# Altium PCB Quadcopter_Main_PCB.PcbDoc (part 2 of 2)
Units mm, origin at the board's own origin, x right, y up, seen from the top; angles counter-clockwise.
Board outline 73 x 59 mm, 4 copper layers (Top Layer, Int1 (GND), Int2 (PWR), Bottom Layer), stack 1.586 mm thick; 101 components, 81 nets, 440 pads, 232 vias.
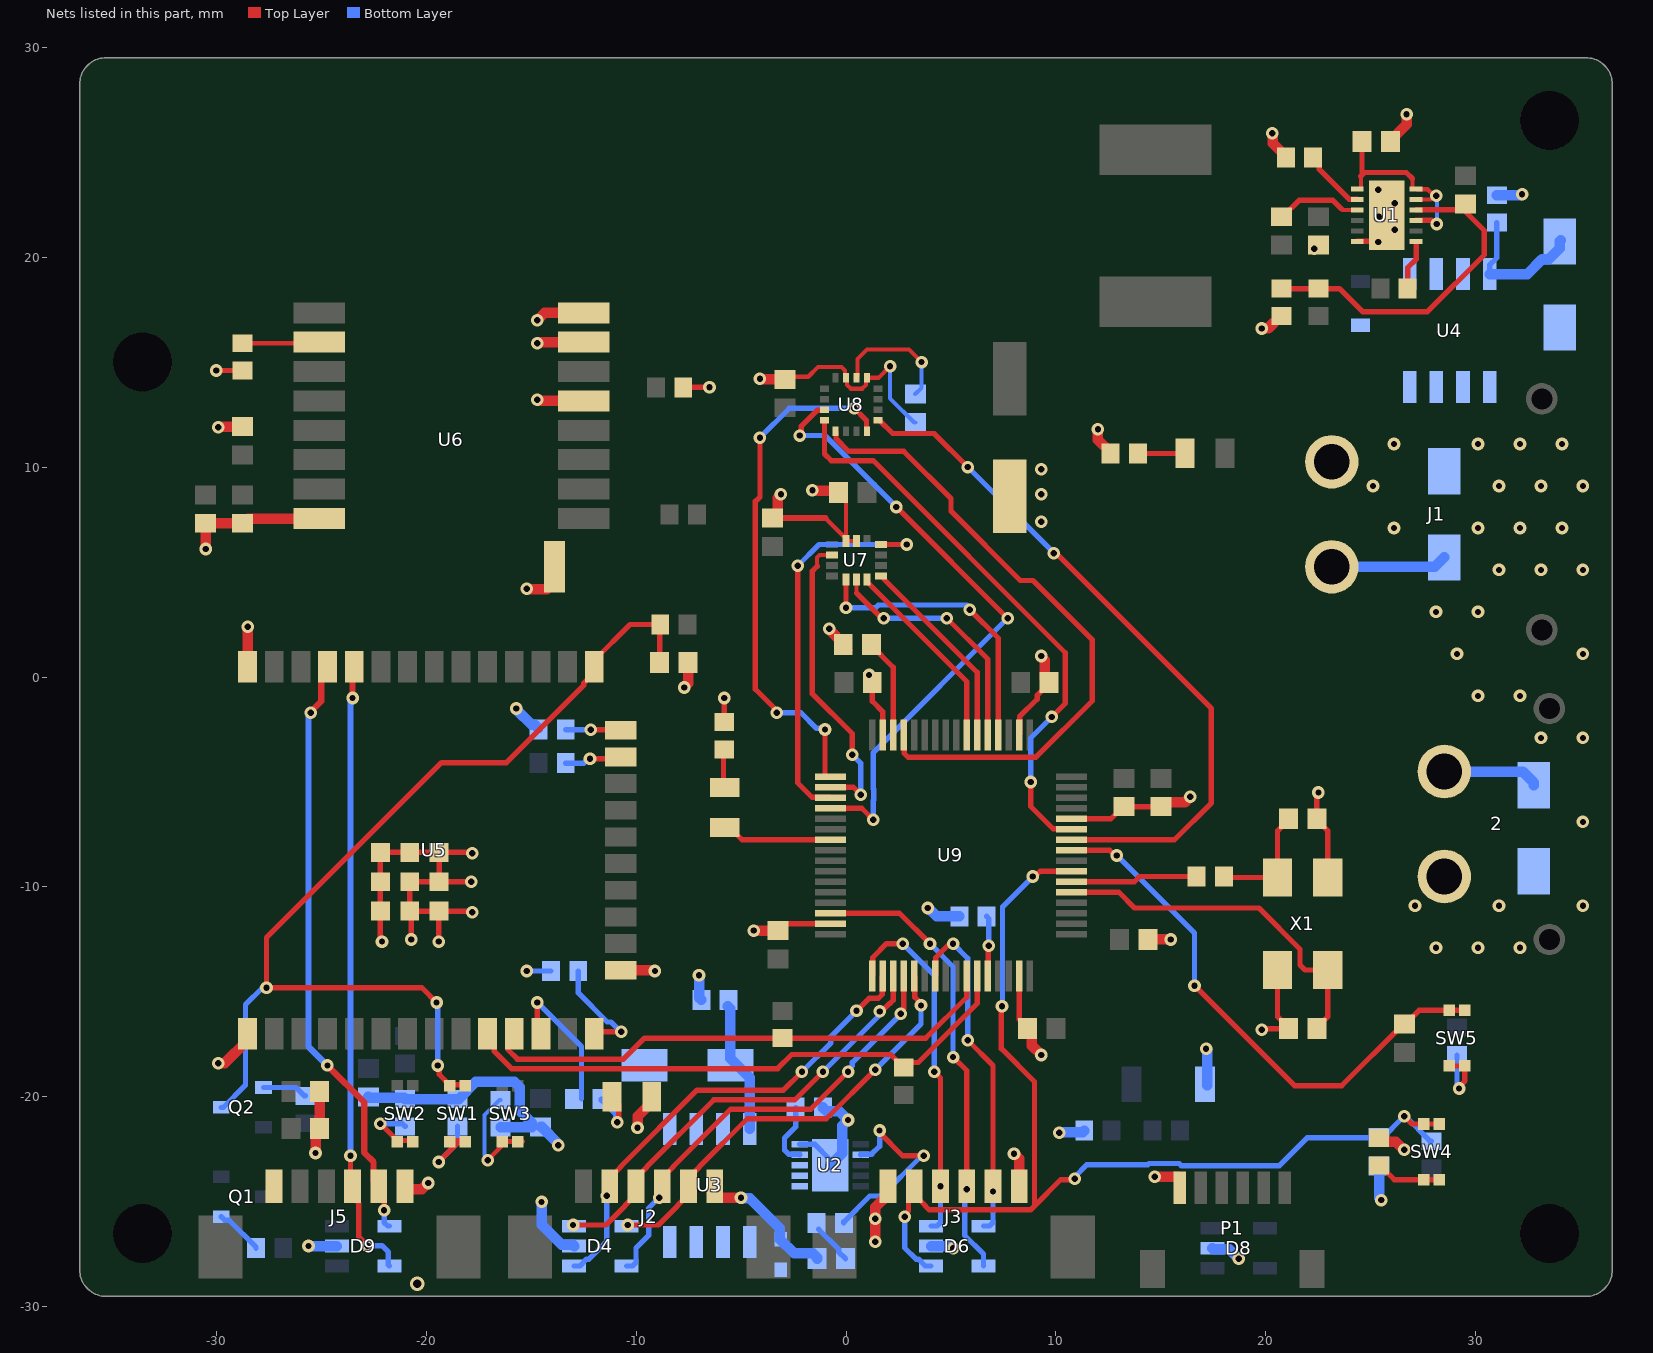
[diagram p4: the nets of this part, all layers, seen from the top]

## Via types
v1: diameter 0.6, hole 0.3, Top Layer to Bottom Layer, 231 vias
v2: diameter 0.7, hole 0.4, Top Layer to Bottom Layer, 1 vias

## Nets (pads, with @x,y where several pads share a name; then routed paths per layer and width w, separated by ;. In a path a pad name is that pad's centre, name@x,y a point inside that pad or via, vN(x,y) a via of type N, cw(c..) or ccw(c..) an arc to the next point about the centre after c; other vN are vias at no path point) (continued)
ESP_RXD0: D9.5 J5.4 U5.34 | length 29.8
  Top Layer w0.254: v1(-23.6,-22.8) -23.6,-24.15 -23.227,-24.523 -23.227,-25.045 -23.2,-25.072 -23.2,-26.673 v1(-22.789,-27.084)
  Top Layer w0.3: v1(-23.5,-1) -23.5,0.42 U5.34@-23.42,0.5
  Bottom Layer w0.254: v1(-22.789,-27.084) -22.102,-27.084 -21.8,-27.386 -21.8,-28 D9.5@-21.75,-28.05
  Bottom Layer w0.3: v1(-23.6,-22.8) -23.6,-1.1 v1(-23.5,-1)
ESP_SCL: R11.2 U5.11 U9.58 | length 25.1
  Top Layer w0.254: U5.11@-15.8,-17 -16.1,-17.3 -16.1,-17.751 -15.651,-18.2 -10.6,-18.2 -9.6,-17.2 R11.2@-3.033,-17.2 3.8,-17.2 5.75,-15.25 U9.58@5.75,-14.238
ESP_SDA: R10.2 U5.10 U9.59 | length 27.2
  Top Layer w0.254: U5.10@-17.07,-17 -17.218,-17.148 -16.747,-17.619 -16.747,-17.833 -15.926,-18.654 -3.254,-18.654 -2.582,-17.982 2.132,-17.982 2.402,-18.252 2.402,-18.302 2.7,-18.6 R10.2@2.75,-18.6 ; R10.2@2.99,-18.36 3.44,-18.36 6.25,-15.55 U9.59@6.25,-14.238
ESP_Status_LED: R26.1 U5.12 | length 7
  Top Layer w0.254: v1(-14.7,-15.5) -14.7,-16.83 U5.12@-14.53,-17
  Bottom Layer w0.254: v1(-14.7,-15.5) -12.6,-17.6 R26.1@-12.6,-20.1
ESP_TXD0: D9.4 J5.5 U5.35 | length 28.7
  Top Layer w0.254: J5.5@-22.25,-24.25 -22,-24.5 v1(-22,-25.4)
  Top Layer w0.3: v1(-25.5,-1.7) -25.5,-1.659 -24.99,-1.149 -24.99,0.2 U5.35@-24.69,0.5 ; v1(-24.7,-18.5) -22.95,-20.25 -22.95,-22.65 -22.5,-23.1 -22.5,-24 J5.5@-22.25,-24.25
  Bottom Layer w0.254: v1(-22,-25.4) -22,-25.977 -21.827,-26.15 D9.4@-21.75,-26.15
  Bottom Layer w0.3: v1(-25.5,-1.7) -25.6,-1.8 -25.6,-17.6 v1(-24.7,-18.5)
GND: 2.1 C3.2 C4.1 C5.1 C6.1 C7.2 C8.2 C9.2 C10.2 C11.2 C12.2 C13.2 C14.1 C15.1 C16.1 C17.1 C18.1 C19.1 C20.1 C21.1 C22.1 C23.1 C24.1 C25.1 C26.1 C27.1 C28.1 C29.1 D4.2 D5.1 D6.2 D7.2 D8.2 D9.2 D10.2 D11.1 D12.1 J1.2 J2.6 J3.6 J5.6 P1.1 R1.2 R4.2 R5.2 R7.2 R8.2 R9.1 R13.2 R15.1 R16.2 R17.1 R19.2 R24.1 R25.1 R27.1 R28.2 R31.2 R32.2 U1.6 U1.13 U2.5 U2.11 U5.1 U5.15 U5.38 U5.39 U5.40 U5.41 U5.42 U5.43 U5.44 U5.45 U5.46 U5.47 U6.8 U6.16 U6.21 U6.23 U6.24 U7.6 U7.7 U8.9 U8.11 U9.12 U9.18 U9.31 U9.47 U9.63 X1.2 X1.4 | length 172.3
  Top Layer w0.2: C17.1@-2.67,13.995 -2.67,14.13 -2.5,14.3 -1.8,14.3 -1.335,14.765 -0.208,14.765 -0.046,14.603 -0.046,14.296 U8.11@0,14.25 0.05,14.2 0.05,13.915 0.23,13.735 0.77,13.735 0.95,13.915 0.95,14.2 U8.9@1,14.25 1.55,14.25 v1(2.1,14.8) ; -0.988,7.575 U7.7@0,6.588 ; C16.1@-0.175,8.975 0,8.8 U7.7@0,6.588 ; U7.6@0.5,6.475 U7.7@0,6.475 U7.7@0,6.588
  Top Layer w0.254: v1(-30,14.6) R15.1@-28.75,14.6 ; v1(-29.9,11.9) v1@-29.875,11.925 ; v1(-22.1,-12.6) -22.1,-12.506 -22.18,-12.426 U5.46@-22.18,-9.75 U5.45@-22.18,-8.35 U5.44@-20.78,-8.35 U5.43@-19.38,-8.35 ; v1(-20.7,-12.5) -20.7,-11.23 U5.40@-20.78,-11.15 ; v1(-19.4,-12.6) -19.4,-11.17 U5.41@-19.38,-11.15 ; v1(-17.85,-9.75) U5.42@-19.38,-9.75 ; v1(-17.8,-11.2) -17.85,-11.15 U5.41@-19.38,-11.15 ; v1(-17.8,-8.4) -17.85,-8.35 U5.43@-19.38,-8.35 ; R17.1@-7.75,13.8 v1(-6.5,13.8) ; R31.2@-5.8,-2.15 v1(-5.8,-1) ; C24.1@-3.2,-12.075 -2.875,-11.75 U9.47@-0.738,-11.75 ; C25.1@1.25,-0.25 1.25,-1.149 1.745,-1.643 1.745,-2.757 U9.31@1.75,-2.762 ; U9.63@8.25,-14.238 8.25,-16.3 8.65,-16.7 C26.1@8.65,-16.75 ; U9.18@8.25,-2.762 8.273,-2.739 8.273,-1.889 9.102,-1.06 9.102,-0.873 9.675,-0.3 C23.1@9.675,-0.25 ; U9.12@10.738,-6.75 12.625,-6.75 13.2,-6.175 C22.1@13.25,-6.175 C28.1@15,-6.175 ; v1(19.8,-16.8) 19.85,-16.75 C19.1@21.075,-16.75 21.075,-16.7 20.55,-16.175 X1.4@20.55,-13.95 ; C20.1@22.425,-6.8 22.95,-7.325 X1.2@22.95,-9.55 ; C20.1@22.425,-6.75 22.425,-5.575 v1(22.5,-5.5) ; U1.6@24.35,20.75 25.349,20.75 v1(25.349,20.716) ; U5.40@-20.78,-11.15 U5.39@-20.78,-9.75 U5.42@-19.38,-9.75 ; U5.40@-20.78,-11.15 U5.41@-19.38,-11.15 ; U5.42@-19.38,-9.75 U5.43@-19.38,-8.35
  Top Layer w0.3: C15.1@-3.5,7.575 -0.988,7.575
  Top Layer w0.4: C21.1@-0.132,1.542 C21.1@0.118,1.292 ; v1(1.1,0.1) 1.1,-0.1 C25.1@1.25,-0.25
  Top Layer w0.5: v1(-30.5,6.1) C11.2@-30.5,7.325 C10.2@-28.75,7.325 ; v1(-29.9,-18.4) -29.6,-18.4 -28.5,-17.3 U5.1@-28.5,-17 ; v1@-29.875,11.925 C9.2@-28.75,11.925 ; C10.2@-28.638,7.438 -28.588,7.438 -28.475,7.55 U6.8@-25.09,7.55 ; U5.38@-28.5,0.5 v1(-28.5,2.4) ; v1(-25.268,-22.668) -25.249,-22.649 -25.249,-21.674 C7.2@-25.075,-21.5 C8.2@-25.075,-19.75 ; J5.6@-21,-24.25 -20.85,-24.4 -20.2,-24.4 v1(-19.9,-24.1) ; v1(-15.2,4.2) -15.174,4.174 -14.926,4.174 -14.92,4.18 -14.245,4.18 -13.895,4.53 U6.16@-13.895,5.255 ; v1(-14.7,13.2) -14.65,13.15 U6.21@-12.5,13.15 ; v1(-14.7,15.9) -14.673,15.9 -14.623,15.95 U6.23@-12.5,15.95 ; v1(-14.7,17) -14.35,17.35 U6.24@-12.5,17.35 ; U5.15@-10.74,-13.965 -9.135,-13.965 v1(-9.1,-14) ; v1(-9.932,-21.472) -9.913,-21.453 -9.913,-20.913 -9.25,-20.25 D12.1@-9.25,-20 ; v1(-7.7,-0.5) -7.7,-0.473 -7.525,-0.298 C12.2@-7.525,0.7 ; J2.6@-6.25,-24.25 -6.25,-24.65 -6.1,-24.8 v1(-5,-24.8) ; v1(-4.4,-12.075) C24.1@-3.25,-12.075 ; v1(-4.1,14.2) -4.075,14.175 C17.1@-2.9,14.175 ; C15.1@-3.5,7.575 -3.45,7.575 -3.25,7.775 -3.25,8.55 v1(-3.1,8.7) ; v1(-1.6,8.9) -1.581,8.881 -0.431,8.881 C16.1@-0.35,8.8 ; v1(-0.8,2.3) -0.781,2.281 -0.781,2.241 -0.132,1.592 C21.1@-0.132,1.542 ; v1(8,-22.7) 8.25,-22.95 J3.6@8.25,-24.25 ; C26.1@8.65,-16.75 8.85,-16.95 8.85,-17.55 v1(9.3,-18) ; v1(9.3,1) 9.3,0.973 9.475,0.798 9.475,-0.05 C23.1@9.675,-0.25 ; v1(12,11.8) 12,11.3 12.6,10.7 R1.2@12.6,10.65 ; C27.1@14.375,-12.5 v1(15.473,-12.5) ; v1(14.7,-23.8) 15.85,-23.8 15.9,-23.85 P1.1@15.9,-24.325 ; C28.1@15,-6.175 15.2,-5.975 16.125,-5.975 v1(16.4,-5.7) ; v1(19.8,16.6) 20.1,16.6 20.7,17.2 R4.2@20.75,17.2 ; v1(20.3,25.9) 20.319,25.881 20.319,25.431 20.95,24.8 R5.2@20.95,24.75 ; v1(22.3,20.4) 22.475,20.575 C4.1@22.5,20.575 ; R32.2@25.388,-21.963 25.563,-22.138 26.185,-22.138 26.56,-22.513 v1(26.588,-22.513) ; C5.1@25.925,25.5 25.925,25.55 26.7,26.325 v1(26.7,26.8)
  Bottom Layer w0.2: v1(2.1,14.8) 2.1,13.275 3.25,12.125 C18.1@3.3,12.125
  Bottom Layer w0.254: v1(-15.2,-14) R16.2@-14.05,-14 ; U2.5@-2.2,-22.25 -1.496,-22.25 -0.75,-22.996 U2.11@-0.75,-23.25
  Bottom Layer w0.5: v1(-25.6,-27.1) D9.2@-24.25,-27.1 ; C13.2@-22.75,-20 -22.7,-20.05 -21.05,-20.05 R25.1@-21,-20.1 R24.1@-18.5,-20.1 -18.45,-20.1 -17.635,-19.285 -15.797,-19.285 -15.539,-19.543 -15.539,-20.657 -15.225,-20.97 C14.1@-14.965,-21.23 ; R27.1@-16.454,-21.45 -16.445,-21.44 C14.1@-14.965,-21.44 ; v1@-15.681,-1.546 -15.681,-1.569 -14.975,-2.275 -14.825,-2.275 R19.2@-14.65,-2.45 ; C14.1@-14.543,-21.43 -14.493,-21.43 -13.719,-22.205 -13.719,-22.281 v1(-13.7,-22.3) ; v1(-14.5,-25) -14.5,-26.097 -13.547,-27.05 -13,-27.05 D4.2@-12.95,-27.1 ; v1(-7,-14.2) -7,-15.266 R8.2@-6.888,-15.378 ; v1(-5,-24.8) -4.981,-24.819 -4.581,-24.819 -3.15,-26.25 -3.15,-26.775 -2.475,-27.45 -1.575,-27.45 -1.375,-27.65 C6.1@-1.375,-27.7 ; v1@-4.4,-12.1 v1(-4.4,-12.075) ; R7.2@-1.1,-20.5 -1.1,-20.505 -0.925,-20.68 -0.32,-20.68 v1(0.1,-21.1) -0.181,-21.381 -0.181,-22.681 U2.11@-0.75,-23.25 ; v1(3.9,-11) 3.927,-11 4.327,-11.4 R28.2@5.4,-11.4 ; D6.2@4.05,-27.1 5,-27.1 v1(5.1,-27.2) ; v1(10.15,-21.7) 10.169,-21.681 11.269,-21.681 R13.2@11.35,-21.6 ; v1(17.15,-17.7) 17.15,-17.727 17.2,-17.777 D10.2@17.2,-19.45 ; D8.2@17.45,-27.2 17.5,-27.25 18.25,-27.25 v1(18.7,-27.7) ; J1.2@23.138,5.25 28.05,5.25 D5.1@28.5,5.7 ; C29.1@25.388,-23.287 25.388,-24.812 v1(25.488,-24.912) ; 2.1@28.5,-4.5 32.225,-4.5 32.75,-5.025 D7.2@32.75,-5.15 ; R9.1@31,22.95 32.123,22.95 32.173,23 v1(32.2,23)
  other v1: -15.7,-1.5 9.3,7.4 9.3,8.7 9.3,9.9 26.136,21.3 25.374,21.935 26.136,22.57 25.349,23.205
IMU_CS: U7.12 U9.20 | length 14
  Top Layer w0.254: v1(0,3.3) 0,3.4 U7.12@0,4.65 ; v1(5.9,3.2) 7.25,1.85 U9.20@7.25,-2.762
  Bottom Layer w0.254: v1(0,3.3) 1.413,3.3 1.54,3.427 5.751,3.427 5.9,3.278 v1(5.9,3.2)
IMU_EXTI1: U7.9 U9.34 | length 14.7
  Top Layer w0.2: -1.377,5.277 -1.377,5.695 -1.26,5.813 U7.9@-0.663,5.813
  Top Layer w0.254: -1.377,5.277 -1.6,5.054 -1.6,-0.8 0.3,-2.7 v1(0.3,-3.7) ; U9.34@-0.738,-5.25 0.35,-5.25 v1(0.7,-5.6)
  Bottom Layer w0.254: v1(0.3,-3.7) 0.7,-4.1 v1(0.7,-5.6)
IMU_EXTI2: U7.4 U9.35 | length 19.1
  Top Layer w0.254: v1(-2.3,5.3) -2.3,-5.038 -1.611,-5.727 -0.761,-5.727 U9.35@-0.738,-5.75 ; U7.4@1.662,6.313 v1(2.9,6.313)
  Bottom Layer w0.254: v1(-2.3,5.3) -1.287,6.313 v1(2.9,6.313)
IMU_MISO: U7.1 U9.22 | length 9.5
  Top Layer w0.254: U7.1@1.662,4.812 1.775,4.812 1.823,4.764 1.823,4.652 6.25,0.225 U9.22@6.25,-2.762
IMU_MOSI: U7.14 U9.23 | length 9.4
  Top Layer w0.254: U7.14@1,4.65 1,4.538 5.75,-0.213 U9.23@5.75,-2.762
IMU_SCK: U7.13 U9.21 | length 11.8
  Top Layer w0.2: 0.5,4 U7.13@0.5,4.65
  Top Layer w0.254: 0.5,4 1.026,3.474 ; 1.027,3.474 1.528,2.973 1.533,2.973 1.706,2.8 v1(1.8,2.8) ; v1(4.8,2.8) 6.75,0.85 U9.21@6.75,-2.762
  Bottom Layer w0.254: v1(1.8,2.8) v1(4.8,2.8)
IO0: C12.1 Q2.3 R21.1 SW1.1 SW1.3 U5.25 | length 49.6
  Top Layer w0.254: v1(-19.5,-15.5) -20.2,-14.8 v1(-27.6,-14.8) -27.6,-12.408 -19.267,-4.075 -16.173,-4.075 -12.483,-0.385 -12.483,-0.293 -11.99,0.2 U5.25@-11.99,0.5 -11.99,0.8 -10.29,2.5 R21.1@-8.85,2.5 -8.875,2.475 C12.1@-8.875,0.7 ; v1(-19.446,-18.503) -19.38,-18.57 -19.38,-18.92 -18.875,-19.425 SW1.1@-18.125,-19.425
  Bottom Layer w0.254: Q2.3@-29.76,-20.5 -29.66,-20.5 -28.6,-19.44 -28.6,-15.6 -27.8,-14.8 v1(-27.6,-14.8) ; v1(-19.5,-15.5) -19.446,-15.554 v1(-19.446,-18.503)
IO2: R19.1 U5.24 | length 2.6
  Top Layer w0.254: v1(-12.156,-2.517) -10.758,-2.517 U5.24@-10.74,-2.535
  Bottom Layer w0.254: R19.1@-13.35,-2.5 -13.333,-2.517 v1(-12.156,-2.517)
IO12: R16.1 U5.14 | length 5.2
  Top Layer w0.2: U5.14@-11.99,-17 U5.14@-11.89,-16.9
  Top Layer w0.254: U5.14@-11.89,-16.9 v1(-10.7,-16.9)
  Bottom Layer w0.254: R16.1@-12.75,-14 -12.75,-15.05 -11.371,-16.429 -11.192,-16.429 -10.72,-16.9 v1(-10.7,-16.9)
IO15: R18.1 U5.23 | length 2.7
  Top Layer w0.254: v1(-12.195,-3.899) -10.834,-3.899 U5.23@-10.74,-3.805
  Bottom Layer w0.254: R18.1@-13.35,-4.1 -12.489,-4.1 -12.288,-3.899 v1(-12.195,-3.899)
ISL85_VCC: C5.2 U1.1 U1.9 U1.11 U1.12 | length 10
  Top Layer w0.2: U1.1@24.35,23.25 24.508,23.25 24.523,23.265 24.523,23.852 ; 26.977,23.735 26.977,23.265 26.992,23.25 U1.12@27.15,23.25 27.165,23.235 27.7,23.235 v1@28.009,22.926 ; U1.11@27.15,22.75 27.834,22.75 v1@28.009,22.926 ; v1(28.118,22.926) v1@28.009,22.926
  Top Layer w0.254: 24.523,23.852 24.698,24.027 26.686,24.027 26.977,23.735 ; 24.575,24.027 C5.2@24.575,25.5 ; U1.9@27.15,21.75 27.879,21.75 28.049,21.579 v1(28.143,21.579)
  Bottom Layer w0.2: v1(28.118,22.926) 28.143,22.9 v1(28.143,21.579)
MAG_CS: U8.4 U9.33 | length 25.2
  Top Layer w0.254: v1(-4.1,11.4) -4.1,8.584 -4.317,8.367 -4.317,-0.583 -3.3,-1.6 v1(-3.3,-1.7) ; v1(-1,-2.5) -1,-4.727 -0.977,-4.75 U9.33@-0.738,-4.75 ; v1(0.4,12.8) 0.977,12.223 0.977,11.723 U8.4@1,11.7
  Bottom Layer w0.254: v1(-4.1,11.4) -2.7,12.8 v1(0.4,12.8) ; v1(-3.3,-1.7) -2.143,-1.7 -1.399,-2.444 -1.056,-2.444 v1(-1,-2.5)
MAG_EXTI: U8.15 U9.36 | length 29.9
  Top Layer w0.254: v1(-2.2,11.5) -2.134,11.566 -2.134,11.94 -1.371,12.702 -1.048,12.702 U8.15@-1.025,12.725 ; U9.36@-0.738,-6.25 0.75,-6.25 v1(1.3,-6.8) ; v1(2.4,8.1) v1(7.7,2.8)
  Bottom Layer w0.254: v1(-2.2,11.5) -1,11.5 v1(2.4,8.1) ; v1(1.3,-6.8) 1.3,-5.887 1.327,-5.86 1.327,-5.34 1.3,-5.313 1.3,-3.6 v1(7.7,2.8)
MAG_MISO: U8.5 U9.10 | length 33.4
  Top Layer w0.254: U8.5@1.525,12.225 1.6,12.225 2.225,11.6 4.2,11.6 v1(5.8,10) ; v1(9.9,5.9) 10,5.9 17.4,-1.5 17.4,-6 15.65,-7.75 U9.10@10.738,-7.75
  Bottom Layer w0.254: v1(5.8,10) v1(9.9,5.9)
MAG_MOSI: U8.16 U9.11 | length 27.4
  Top Layer w0.254: U8.16@-1.025,12.225 -1.025,10.625 -0.7,10.3 1.3,10.3 10.442,1.158 10.442,-1.258 v1(9.8,-1.9) ; v1(8.8,-5) 8.8,-6.162 9.865,-7.227 10.715,-7.227 U9.11@10.738,-7.25
  Bottom Layer w0.254: v1(8.8,-5) 8.8,-2.9 v1(9.8,-1.9)
MAG_SCK: U8.1 U9.29 | length 30.8
  Top Layer w0.254: U8.1@-0.5,11.7 -0.477,11.677 -0.477,11.354 0.123,10.754 2.746,10.754 5,8.5 5,7.9 8.3,4.6 8.9,4.6 11.731,1.769 11.731,-1.131 9.035,-3.826 2.965,-3.826 2.773,-3.635 2.773,-2.785 U9.29@2.75,-2.762
Main_MOSFET_Gate: D3.1 R9.2 U4.4 | length 6.9
  Bottom Layer w0.254: U4.4@30.655,19.188 30.655,19.626 31,19.971 R9.2@31,21.65
  Bottom Layer w0.5: U4.4@30.655,19.188 32.438,19.188 33.15,19.9 33.475,19.9 34,20.425 D3.1@34,20.75 D3.1@34.05,20.8
Main_MOSFET_Source: D3.2 F1.1 U4.1 U4.2 U4.3
NetC1_2: C1.2 U1.3 | length 4.1
  Top Layer w0.2: 23.6,22.3 23.65,22.25 U1.3@24.35,22.25
  Top Layer w0.254: C1.2@20.75,21.925 20.8,21.925 21.577,22.702 23.198,22.702 23.6,22.3
NetC2_1: C2.1 R2.2 R4.1 U1.10 | length 15.7
  Top Layer w0.254: R4.1@20.75,18.5 R2.2@22.5,18.5 23.5,18.5 24.6,17.4 27.7,17.4 30.4,20.1 30.4,21.267 29.412,22.254 C2.1@29.362,22.254 ; U1.10@27.15,22.25 29,22.25
NetC18_2: C18.2 U8.10 | length 6.1
  Top Layer w0.2: U8.10@0.5,14.25 0.55,14.3 0.55,15.15 1,15.6 3,15.6 v1(3.6,15)
  Bottom Layer w0.2: C18.2@3.3,13.475 3.6,13.775 v1(3.6,15)
NetC20_2: C20.2 R29.1 X1.3 | length 5.6
  Top Layer w0.254: R29.1@18,-9.5 18.05,-9.55 X1.3@20.55,-9.55 20.55,-7.325 21.075,-6.8 C20.2@21.075,-6.75
NetD1_1: D1.1 R1.1 | length 2.2
  Top Layer w0.254: R1.1@13.9,10.65 D1.1@16.15,10.65
NetD12_2: D12.2 R26.2 | length 2.8
  Top Layer w0.254: D12.2@-11.15,-20 -10.827,-20.323 -10.827,-21.173 v1@-10.8,-21.2
  Bottom Layer w0.254: R26.2@-11.65,-20.1 -11.65,-20.15 -10.966,-20.834 -10.966,-21.134 v1(-10.9,-21.2)
NetD13_1: D13.1 R31.1 | length 1.7
  Top Layer w0.254: R31.1@-5.832,-3.616 -5.832,-5.216 D13.1@-5.782,-5.266
NetQ1_1: Q1.1 R20.2 | length 2.3
  Bottom Layer w0.254: Q1.1@-29.76,-25.7 -29.587,-25.873 -29.377,-25.873 -28.1,-27.15 R20.2@-28.1,-27.2
NetQ2_1: Q2.1 R23.2 | length 2.2
  Bottom Layer w0.254: Q2.1@-27.74,-19.55 -26.2,-19.55 -25.8,-19.95 R23.2@-25.75,-19.95
NetR3_1: R3.1 U1.7 | length 2.4
  Top Layer w0.2: U1.7@27.15,20.75 27.152,20.748 27.152,20.538
  Top Layer w0.254: R3.1@26.75,18.5 26.75,19.492 27.152,19.894 27.152,20.538
NetR5_1: R5.1 U1.2 | length 3.1
  Top Layer w0.254: R5.1@22.25,24.75 22.548,24.452 22.548,24.175 23.961,22.762 24.338,22.762 U1.2@24.35,22.75
NetR6_1: R6.1 U2.7 | length 9.6
  Top Layer w0.254: v1(1.6,-21.6) 1.6,-21.7 2.7,-22.8 v1(3.7,-22.8)
  Bottom Layer w0.254: R6.1@-0.1,-26 -0.1,-25.95 1.133,-24.717 1.689,-24.717 3.606,-22.8 v1(3.7,-22.8) ; U2.7@0.7,-22.75 0.723,-22.727 1.221,-22.727 1.6,-22.348 v1(1.6,-21.6)
NetR7_1: R7.1 U2.4 | length 3.1
  Bottom Layer w0.254: R7.1@-2.4,-20.5 -2.4,-21.428 -2.927,-21.955 -2.927,-22.535 -2.735,-22.727 -2.223,-22.727 U2.4@-2.2,-22.75
NetR15_2: R15.2 U6.2 | length 3.7
  Top Layer w0.2: R15.2@-28.75,15.9 -25.14,15.9 U6.2@-25.09,15.95
NetR24_2: R24.2 SW1.2 SW1.4 | length 4.3
  Top Layer w0.254: v1(-19.4,-23.1) SW1.2@-18.375,-22.075 ; SW1.4@-18.875,-22.075 SW1.2@-18.375,-22.075 ; SW1.2@-18.125,-22.075 SW1.2@-18.375,-22.075
  Bottom Layer w0.254: v1(-19.4,-23.1) -18.5,-22.2 R24.2@-18.5,-21.4
NetR25_2: R25.2 SW2.2 SW2.4 | length 3.1
  Top Layer w0.254: v1(-22.186,-21.278) -22.172,-21.278 -21.375,-22.075 SW2.2@-20.625,-22.075
  Bottom Layer w0.254: v1(-22.186,-21.278) -21.122,-21.278 R25.2@-21,-21.4
NetR27_2: R27.2 SW3.2 SW3.4 | length 5.2
  Top Layer w0.2: v1@-16.9,-23 -16.9,-22.85 SW3.4@-16.175,-22.125
  Top Layer w0.254: SW3.4@-16.175,-22.125 SW3.2@-15.425,-22.125
  Bottom Layer w0.2: v1(-17.061,-23.02) -17.061,-22.911 -17.219,-22.753 -17.219,-20.865 -16.504,-20.15 R27.2@-16.454,-20.15
NetR28_1: R28.1 U9.60 | length 2.9
  Top Layer w0.254: U9.60@6.75,-14.238 6.773,-14.215 6.773,-12.827 v1(6.8,-12.8)
  Bottom Layer w0.254: R28.1@6.7,-11.4 6.8,-11.5 v1(6.8,-12.8)
NetR32_1: R32.1 SW4.2 SW4.4 | length 3.2
  Top Layer w0.254: R32.1@25.388,-23.263 25.438,-23.263 26.113,-23.938 SW4.4@27.513,-23.938 SW4.2@28.263,-23.938
NetR33_2: R33.2 SW5.2 SW5.4 | length 3.6
  Top Layer w0.254: SW5.4@28.725,-18.525 SW5.2@29.475,-18.525 29.475,-19.231 29.2,-19.506 v1(29.2,-19.6)
  Bottom Layer w0.254: R33.2@29.1,-18 29.1,-19.5 v1(29.2,-19.6)
OSC_IN: C19.2 U9.5 X1.1 | length 17.2
  Top Layer w0.254: U9.5@10.738,-10.25 13,-10.25 13.75,-11 19.662,-11 21.627,-12.965 21.627,-13.708 21.869,-13.95 X1.1@22.95,-13.95 22.95,-16.175 22.425,-16.7 C19.2@22.425,-16.75
OSC_OUT: R29.2 U9.6 | length 6.1
  Top Layer w0.254: U9.6@10.738,-9.75 13.739,-9.75 13.989,-9.5 R29.2@16.7,-9.5
Programmer_MOSFET_Gate: D2.1 R8.1 U3.4 | length 6.3
  Bottom Layer w0.5: R8.1@-5.624,-15.682 -5.512,-15.794 -5.512,-18.163 -4.59,-19.085 U3.4@-4.59,-21.524
Programmer_MOSFET_Source: C6.2 D2.2 R6.2 U2.1 U2.2 U2.3 U3.1 U3.2 U3.3 | length 1.9
  Bottom Layer w0.254: R6.2@-1.3,-26.3 -0.348,-27.252 -0.348,-27.377 C6.2@-0.025,-27.7
SPI_3_CS: D4.1 J2.2 U9.50 | length 22.8
  Top Layer w0.254: v1(-11.4,-24.7) -11.25,-24.55 J2.2@-11.25,-24.25 -11.25,-23.85 -10.727,-23.327 -10.727,-23.315 -7.091,-19.678 -2.978,-19.678 v1(-2.1,-18.8) ; v1(0.5,-15.9) 1.097,-15.302 1.535,-15.302 1.727,-15.111 1.727,-14.261 U9.50@1.75,-14.238
  Bottom Layer w0.254: D4.1@-12.95,-28.05 -12.675,-28.05 -12.352,-27.727 -12.24,-27.727 -11.4,-26.887 v1(-11.4,-24.7) ; v1(-2.1,-18.8) -0.723,-17.423 -0.723,-17.123 v1(0.5,-15.9)
SPI_3_MISO: D4.5 J2.4 U9.52 | length 21.7
  Top Layer w0.254: v1(-8.9,-24.8) -8.75,-24.65 J2.4@-8.75,-24.25 -8.75,-23.85 -8.227,-23.327 -8.227,-23.315 -5.499,-20.586 -1.686,-20.586 v1(0.1,-18.8) ; v1(2.612,-16.042) 2.612,-15.949 2.75,-15.811 U9.52@2.75,-14.238
  Bottom Layer w0.254: D4.5@-10.45,-28.05 -10.175,-28.05 -10.002,-27.877 -10.002,-27.202 -9.4,-26.6 -9.4,-25.3 v1(-8.9,-24.8) ; v1(0.1,-18.8) 0.1,-18.706 0.3,-18.506 0.3,-18.355 v1(2.612,-16.042)
SPI_3_MOSI: D4.4 J2.5 U9.53 | length 20.8
  Top Layer w0.254: v1(-10.4,-26.1) -8.938,-26.1 -8.023,-25.185 -8.023,-25.173 -7.5,-24.65 J2.5@-7.5,-24.25 -7.5,-23.85 -6.977,-23.327 -6.977,-23.315 -4.703,-21.04 -0.94,-21.04 v1(1.4,-18.7) ; U9.53@3.25,-14.238 3.273,-14.261 3.273,-15.249 3.573,-15.549 v1(3.573,-15.642)
  Bottom Layer w0.254: v1(1.4,-18.7) 3.573,-16.527 v1(3.573,-15.642)
SPI_3_SCK: D4.3 J2.3 U9.51 | length 21.4
  Top Layer w0.254: v1(-13,-26.1) -11.438,-26.1 -10.523,-25.185 -10.523,-25.173 -10,-24.65 J2.3@-10,-24.25 -10,-23.85 -9.477,-23.327 -9.477,-23.315 -6.295,-20.132 -2.432,-20.132 v1(-1.1,-18.8) ; v1(1.603,-15.926) 1.696,-15.926 2.056,-15.567 2.07,-15.567 2.25,-15.387 U9.51@2.25,-14.238
  Bottom Layer w0.254: v1(-1.1,-18.8) 1.537,-16.163 1.537,-15.992 v1(1.603,-15.926)
STM_RST: C29.2 D6.1 J3.2 R30.1 SW4.1 SW4.3 U9.7 | length 53.2
  Top Layer w0.254: v1(2.8,-25.7) 2.8,-25.606 2.977,-25.429 2.977,-24.523 J3.2@3.25,-24.25 3.25,-24.65 3.773,-25.173 3.773,-25.185 3.965,-25.377 8.785,-25.377 8.977,-25.185 ; v1(7.431,-15.687) 7.4,-15.718 7.4,-17.7 8.977,-19.277 8.977,-25.185 ; v1(8.9,-9.5) 8.994,-9.5 9.244,-9.25 U9.7@10.738,-9.25 ; v1(10.9,-23.9) 10.857,-23.943 10.219,-23.943 8.977,-25.185 ; v1(26.588,-20.912) 26.963,-21.287 SW4.3@27.513,-21.287 SW4.1@28.263,-21.287
  Bottom Layer w0.254: v1(2.8,-25.7) 2.8,-27.187 3.34,-27.727 3.452,-27.727 3.775,-28.05 D6.1@4.05,-28.05 ; v1(7.431,-15.687) 7.452,-15.666 7.452,-10.948 v1(8.9,-9.5) ; v1(10.9,-23.9) 10.9,-23.8 11.473,-23.227 14.386,-23.227 14.44,-23.173 15.872,-23.173 15.98,-23.281 20.629,-23.281 21.972,-21.937 C29.2@25.388,-21.937 ; C29.2@25.5,-22 v1(26.588,-20.912) ; v1@26.638,-20.912 27.838,-22.112 R30.1@27.888,-22.112
STM_Status_Button: C30.1 SW5.1 SW5.3 U9.9 | length 26.3
  Top Layer w0.254: U9.9@10.738,-8.25 12.556,-8.25 12.806,-8.5 v1(12.9,-8.5) ; v1(16.6,-14.7) 21.362,-19.463 23.613,-19.463 26.55,-16.525 C30.1@26.6,-16.525 ; C30.1@26.65,-16.525 27.3,-15.875 SW5.3@28.725,-15.875 SW5.1@29.475,-15.875
  Bottom Layer w0.254: v1(12.9,-8.5) 16.6,-12.2 v1(16.6,-14.7)
STM_Status_LED: D13.2 U9.39 | length 5.3
  Top Layer w0.254: D13.2@-5.782,-7.166 -5.532,-7.166 -4.948,-7.75 U9.39@-0.738,-7.75
SWCLK: D6.3 J3.3 U9.49 | length 17.1
  Top Layer w0.254: U9.49@1.25,-14.238 1.273,-14.215 1.273,-13.365 1.938,-12.7 v1(2.7,-12.7) ; v1(4.2,-18.8) 4.5,-19.1 v1(4.5,-24.25)
  Bottom Layer w0.254: v1(2.7,-12.7) 4.2,-14.2 v1(4.2,-18.8) ; D6.3@4.05,-26.15 4.325,-26.15 4.498,-25.977 4.498,-24.252 v1(4.5,-24.25)
SWDIO: D6.5 J3.4 U9.46 | length 21.8
  Top Layer w0.254: U9.46@-0.738,-11.25 2.55,-11.25 v1(4,-12.7) ; v1(5.1,-18.1) 5.75,-18.75 J3.4@5.75,-24.25 v1(5.75,-24.4)
  Bottom Layer w0.254: v1(4,-12.7) 5.1,-13.8 v1(5.1,-18.1) ; v1(5.75,-24.4) 5.75,-24.494 5.648,-24.596 5.648,-26.585 6.55,-27.487 D6.5@6.55,-28.05
TRACESWO: D6.4 J3.5 U9.55 | length 16.6
  Top Layer w0.254: U9.55@4.25,-14.238 4.273,-14.215 4.273,-13.365 4.872,-12.766 5.034,-12.766 v1(5.1,-12.7) ; v1(5.8,-17.3) 7,-18.5 J3.5@7,-24.25 v1(7,-24.5)
  Bottom Layer w0.254: v1(5.1,-12.7) 5.8,-13.4 v1(5.8,-17.3) ; D6.4@6.55,-26.15 6.825,-26.15 6.998,-25.977 6.998,-24.502 v1(7,-24.5)
VCAP_1: C21.2 U9.30 | length 4.7
  Top Layer w0.254: C21.2@1.218,1.542 1.218,1.492 2.25,0.46 U9.30@2.25,-2.762
VIN_Battery: 2.2 D5.2 D7.1 J1.1 U4.5 U4.6 U4.7 U4.8
  other v1: 28.1,-12.9 30.1,-12.9 32.1,-12.9 27.1,-10.9 31.1,-10.9 35.1,-10.9 35.1,-6.9 33.1,-2.9 35.1,-2.9 30.1,-0.9 32.1,-0.9 29.1,1.1 35.1,1.1 28.1,3.1 30.1,3.1 31.1,5.1 33.1,5.1 35.1,5.1 26.1,7.1 30.1,7.1 32.1,7.1 34.1,7.1 25.1,9.1 31.1,9.1 33.1,9.1 35.1,9.1 26.1,11.1 30.1,11.1 32.1,11.1 34.1,11.1
VIN_Programer: D11.2 J3.1 J5.1 U3.5 U3.6 U3.7 U3.8 | length 2.9
  Top Layer w0.5: v1(1.4,-26.9) 1.4,-25.25 2,-24.65 J3.1@2,-24.25
  other v1: 1.4,-25.8
  other v2: -20.422,-28.89
pads on no net: 2.3 2.4 J1.3 J1.4 J2.MP1 J2.MP2 J3.MP1 J3.MP2 J5.MP1 J5.MP2 P1.MP1 P1.MP2 U1.8 U2.6 U5.4 U5.5 U5.6 U5.7 U5.8 U5.16 U5.17 U5.18 U5.19 U5.20 U5.21 U5.22 U5.26 U5.27 U5.32 U5.33 U6.1 U6.4 U7.10 U7.11 U8.3 U8.6 U8.7 U8.8 U8.12 U8.14 U9.2 U9.3 U9.4 U9.14 U9.15 U9.16 U9.17 U9.24 U9.25 U9.26 U9.27 U9.28 U9.37 U9.38 U9.40 U9.45 U9.54 U9.56 U9.61 U9.62

## Polygon pours and split planes (outlines as drawn)
GND on Bottom Layer "NONET_L04_P030" (solid, shelved, pour order 30): 30.7,-3.2 25,2.5 25.05,6.55 24.4,7.2 21.7,7.2 19.9,9 19.9,10.7 22.2,13 33.8,13 36,15.2 36,23 30,29 10.9,29 10.4,28.5 10.4,17.7 9.7,17 5.8,17 4.9,17.9 -30.2,17.9 -31.6,16.5 -31.6,3.4 -29,0.8 -29,-17.4 -29.3,-17.7 -30.2,-17.7 -31.4,-18.9 -31.4,-27.9 -30.1,-29.2 34.1,-29.2 36.3,-27 36.3,-15.2 36,-14.9 27.1,-14.9 25.6,-13.4 25.6,-8.2 26.8,-7 29.6,-7 30.7,-5.9
Programmer_MOSFET_Source on Bottom Layer "NONET_L04_P003" (solid, shelved, pour order 3): -0.8,-25.86 -0.94,-26 -1.8,-26 -1.903,-26 -1.982,-25.921 -1.982,-25.768 -3.65,-24.1 -5,-24.1 -6.3,-22.8 -9.2,-22.8 -9.3,-22.7 -9.3,-20.454 -10.135,-19.619 -10.135,-19.518 -10.236,-19.416 -10.643,-19.416 -10.846,-19.213 -10.846,-17.714 -10.719,-17.587 -8.56,-17.587 -8.357,-17.791 -8.357,-20.077 -8.133,-20.3 -5.5,-20.3 -5.2,-20.6 -5.2,-22.7 -4.8,-23.1 -1.829,-23.1 -1.829,-24.674 -1.436,-25.067 -1.325,-25.19 -1.197,-25.19 -0.8,-25.587
Battery_Protected on Bottom Layer "NONET_L04_P008" (solid, shelved, pour order 8): 23.4,18.9 23.4,20.1 22,21.5 22,22.3 22.1,22.4 23.6,22.4 24.5,21.5 24.5,19.7 25.3,19.7 25.9,19.1 25.9,18.4 25.6,18.1 24.2,18.1
VIN_Programer on Bottom Layer "NONET_L04_P000" (solid, shelved, pour order 0): 1,-25.5 1.1,-25.4 1.7,-25.4 1.8,-25.5 1.8,-29.1 1.623,-29.277 -8.923,-29.277 -9,-29.2 -9,-26 -8.9,-25.9 -4.3,-25.9 -4.1,-26.1 -4.1,-27.6 -3.9,-27.8 -2.8,-27.8 -2.1,-28.5 0.8,-28.5 1,-28.3
VIN_Battery on Bottom Layer "NONET_L04_P021" (solid, shelved, pour order 21): 24.9,12.2 26,13.3 26,14.3 26.6,14.9 31.5,14.9 31.8,14.6 31.8,12.7 32.3,12.2 35.1,12.2 36,11.3 36,-13.8 35.8,-14 27.6,-14 26.5,-12.9 26.5,-8.6 27.5,-7.6 29.9,-7.6 31.3,-6.2 31.3,1 24.3,8 22.5,8 21.1,9.4 21.1,11 22.3,12.2
Main_MOSFET_Source on Bottom Layer "NONET_L04_P007" (solid, shelved, pour order 7): 34.7,15.2 35.1,15.6 35.1,17.8 34.8,18.1 30.1,18.1 29.9,18.3 29.9,19.9 29.7,20.1 26.5,20.1 26.3,19.9 26.3,18.3 25.8,17.8 24.4,17.8 23.7,17.1 23.7,16.1 23.9,15.9 31.7,15.9 32.4,15.2
VIN_Programer on Bottom Layer "NONET_L04_P002" (solid, shelved, pour order 2): -21.3,-28.7 -21.3,-29.2 -21.177,-29.277 -8.923,-29.277 -8.923,-28.723 -8.9,-28.7 -13.8,-28.7 -14,-28.5 -21.1,-28.5 -14,-28.5 -21.1,-28.5
GND on Top Layer "NONET_L01_P029" (solid, shelved, pour order 29): 30.7,-3.2 25,2.5 25.05,6.55 24.4,7.2 21.7,7.2 19.9,9 19.9,10.7 22.2,13 33.8,13 36,15.2 36,23 30,29 10.9,29 10.4,28.5 10.4,17.7 9.7,17 5.8,17 4.9,17.9 -30.2,17.9 -31.6,16.5 -31.6,3.4 -29,0.8 -29,-17.4 -29.3,-17.7 -30.2,-17.7 -31.4,-18.9 -31.4,-27.9 -30.1,-29.2 34.1,-29.2 36.3,-27 36.3,-15.2 36,-14.9 27.1,-14.9 25.6,-13.4 25.6,-8.2 26.8,-7 29.6,-7 30.7,-5.9
GND on Top Layer "NONET_L01_P027" (solid, shelved, pour order 27): 9.3,10.5 7,10.5 6.8,10.3 6.8,6.9 7,6.7 9.4,6.7 9.9,7.2 9.9,9.9
VIN_Battery on Top Layer "NONET_L01_P015" (solid, shelved, pour order 15): 25.75,2.65 31.3,-2.9 31.3,-6.2 29.9,-7.6 27.5,-7.6 26.5,-8.6 26.5,-12.9 27.6,-14 35.8,-14 36,-13.8 36,11.3 35.1,12.2 22.3,12.2 21.1,11 21.1,9.4 22.5,8 24.3,8 25.75,6.55
3V3 on Top Layer "NONET_L01_P026" (solid, shelved, pour order 26): 12.1,16.1 12,16 7.2,16 6.9,15.7 6.9,12.7 7.2,12.4 9.5,12.4 11.4,14.3 14.15,14.3 14.65,14.8 16.5,14.8 17.4,15.7 17.4,19.2 12.1,19.2
Converter_Out on Top Layer "NONET_L01_P013" (solid, shelved, pour order 13): 24.652,21.376 24.652,21.136 24.652,21.112 24.628,21.112 24.044,21.112 24.008,21.077 23.863,21.078 23.85,21.065 23.85,20.377 23.876,20.351 23.876,19.522 23.52,19.166 18.897,19.166 16.688,21.376 13.386,21.376 11.328,23.434 11.328,26.507 11.938,27.117 17.348,27.117 18.034,26.431 18.034,23.103 19.913,21.224 21.285,21.224 21.463,21.046 21.463,20.03 21.615,19.878 23.165,19.878 23.241,19.954 23.241,21.221 23.291,21.271 23.56,21.271 23.643,21.351 23.67,21.351 23.748,21.35 23.774,21.376
Battery_Protected on Top Layer "NONET_L01_P012" (solid, shelved, pour order 12): 22.936,21.478 21.996,21.478 21.996,22.367 22.936,22.367 23.438,21.865 24.638,21.865 24.638,21.636 23.627,21.635 23.469,21.478
VIN_Programer on Top Layer "NONET_L01_P001" (solid, shelved, pour order 1): -27.6,-23.3 -26.9,-23.3 -26.7,-23.5 -26.7,-28.4 -26.6,-28.5 -19.8,-28.5 -19.7,-28.6 -19.7,-29.2 -19.8,-29.3 -23.672,-29.278 -27.6,-29.3 -27.8,-29.1 -27.8,-23.5 -27.8,-29.1 -27.8,-23.5
3V3 on Int2 (PWR) "NONET_L03_P024" (solid, shelved, pour order 24): -29,-17.4 -29.3,-17.7 -30.2,-17.7 -31.4,-18.9 -31.4,-27.9 -30.1,-29.2 34.1,-29.2 36.3,-27 36.3,-15.2 36,-14.9 27.1,-14.9 25.6,-13.4 25.6,-7.3 24,-5.7 24,-1.6 19.9,2.5 19.9,10.7 22.2,13 33.8,13 36,15.2 36,23 30,29 10.9,29 10.4,28.5 10.4,17.7 9.7,17 5.8,17 4.9,17.9 -30.2,17.9 -31.6,16.5 -31.6,3.4 -29,0.8
GND on Int2 (PWR) "NONET_L03_P031" (solid, shelved, pour order 31): 23.9,7.1 24.9,6.1 24.9,1.8 30.3,-3.6 30.3,-5.6 29.4,-6.5 27.5,-6.5 25.1,-4.1 25.1,-1.4 20.9,2.8 20.9,6.6 21.4,7.1 22,7.1
VIN_Battery on Int2 (PWR) "NONET_L03_P022" (solid, shelved, pour order 22): 25.737,6.563 25.737,2.663 31.3,-2.9 31.3,-6.2 29.9,-7.6 27.5,-7.6 26.5,-8.6 26.5,-12.9 27.6,-14 35.8,-14 36,-13.8 36,11.3 35.1,12.2 22.3,12.2 21.1,11 21.1,9.4 22.5,8 24.3,8
GND on Int1 (GND) "NONET_L02_P028" (solid, shelved, pour order 28): 30.7,-3.2 25,2.5 25.05,6.55 24.4,7.2 21.7,7.2 19.9,9 19.9,10.7 22.2,13 33.8,13 36,15.2 36,23 30,29 10.9,29 10.4,28.5 10.4,17.7 9.7,17 5.8,17 4.9,17.9 -30.2,17.9 -31.6,16.5 -31.6,3.4 -29,0.8 -29,-17.4 -29.3,-17.7 -30.2,-17.7 -31.4,-18.9 -31.4,-27.9 -30.1,-29.2 34.1,-29.2 36.3,-27 36.3,-15.2 36,-14.9 27.1,-14.9 25.6,-13.4 25.6,-8.2 26.8,-7 29.6,-7 30.7,-5.9
VIN_Battery on Int1 (GND) "NONET_L02_P023" (solid, shelved, pour order 23): 25.75,6.55 25.75,2.65 31.3,-2.9 31.3,-6.2 29.9,-7.6 27.5,-7.6 26.5,-8.6 26.5,-12.9 27.6,-14 35.8,-14 36,-13.8 36,11.3 35.1,12.2 22.3,12.2 21.1,11 21.1,9.4 22.5,8 24.3,8

## Silkscreen, mask and mechanical layers (free items; w line width, h text height)
Top Overlay:
  drawing of 34 lines, arcs and shapes, not listed
  text "Quadcopter / Main PCB / 06.2026 / v1.0" at -35.9,21 h1.02
  text "by: / Arkadiusz / Rozmarynowicz" at -8.6,15.5 h1.02
  text "Battery" at 24.703,13.442 h1.02
  text "POWER" at 12.603,12.303 h1.02
  text "+3S" at 21.597,8.703 h1.02 r90
  text "GND" at 21.597,3.903 h1.02 r90
  text "GND" at 26.697,-5.697 h1.02 r90
  text "STM" at -7.197,-9.297 h1.02
  text "+3S" at 26.697,-10.997 h1.02 r90
  text "ESC" at 28.203,-13.197 h1.02
  text "GND" at 15.45,-17.05 h1 r270
  text "M3" at 19.35,-18.05 h1 r270
  text "M1" at 17.45,-18.45 h1 r270
  text "+" at -34.95,-18.617 h1
  text "STM" at 31.697,-18.697 h1.02 r90
  text "o" at -18.797,-18.897 h1.02
  text "DTR" at -35.05,-19.75 h1
  text "ESP" at -7.997,-20.497 h1.02
  text "RTS" at -35.05,-21.05 h1
  text "M2" at 18.45,-21.15 h1 r270
  text "M4" at 20.35,-21.15 h1 r270
  text "EN" at -22.303,-21.697 h1.02 r90
  text "B" at 16.45,-22.15 h1 r270
  text "ESP" at -13.703,-22.197 h1.02 r90
  text "RX" at -35.05,-22.35 h1
  text "+" at -11.983,-22.35 h1 r90
  text "+" at 2.517,-22.35 h1 r90
  text "MI" at -8.25,-23.05 h1 r90
  text "MO" at -6.95,-23.05 h1 r90
  text "G" at -5.65,-23.05 h1 r90
  text "RS" at 3.65,-23.05 h1 r90
  text "CLK" at 4.95,-23.05 h1 r90
  text "DIO" at 6.25,-23.05 h1 r90
  text "TRACE" at 7.55,-23.05 h1 r90
  text "GND" at 8.85,-23.05 h1 r90
  text "CS" at -10.85,-23.15 h1 r90
  text "SC" at -9.55,-23.15 h1 r90
  text "_" at -20.417,-23.45 h1 r90
  text "TX" at -35.15,-23.65 h1
  text "ESC" at 22.903,-24.303 h1.02 r270
  text "EXT" at -16.197,-24.597 h1.02
  text "STM" at -1.997,-24.597 h1.02
  text "ESP" at -30.697,-24.697 h1.02
  text "GND" at -35.15,-24.95 h1
  text "STM RST" at 30.297,-27.797 h1.02 r90
Bottom Overlay:
  circle w0.254: c25.6,19.7 r0.1
Mechanical 1:
  lines w0.1: 9.2,17.8 ccw(c9.2,17.8) 9.2,17.8 ; 9.2,17.8 cw(c9.2,18.1) 8.9,18.1 8.9,28 cw(c9.2,28) 9.2,28.3 9.8,28.3 cw(c9.8,28) 10.1,28 10.1,18.1 cw(c9.8,18.1) 9.8,17.8 9.2,17.8
  lines w0.12: -36.5,-28.23 ccw(c-35.23,-28.23) -35.23,-29.5 35.23,-29.5 ccw(c35.23,-28.23) 36.5,-28.23 36.5,28.23 ccw(c35.23,28.23) 35.23,29.5 -18,29.5 -35.23,29.5 ccw(c-35.23,28.23) -36.5,28.23 -36.5,-28.23

## Text inside footprints (layer, text, board x,y; h text height)
C3: Top Overlay "+" at 10,15.5 h1.22 r90
F1: Mechanical 13 "*" at 23.852,17.209 h1.27 r270